# Altium PCB Controller.PcbDoc
Units mil, origin at the board's own origin, x right, y up, seen from the top; angles counter-clockwise.
Board outline 4574.71 x 2000 mil, 4 copper layers (Component Side, Ground Plane, Power Plane, Solder Side), stack 60.8 mil thick; 41 components, 203 nets, 155 pads, 164 vias.
Unrouted connection lines stored in the file: 247.
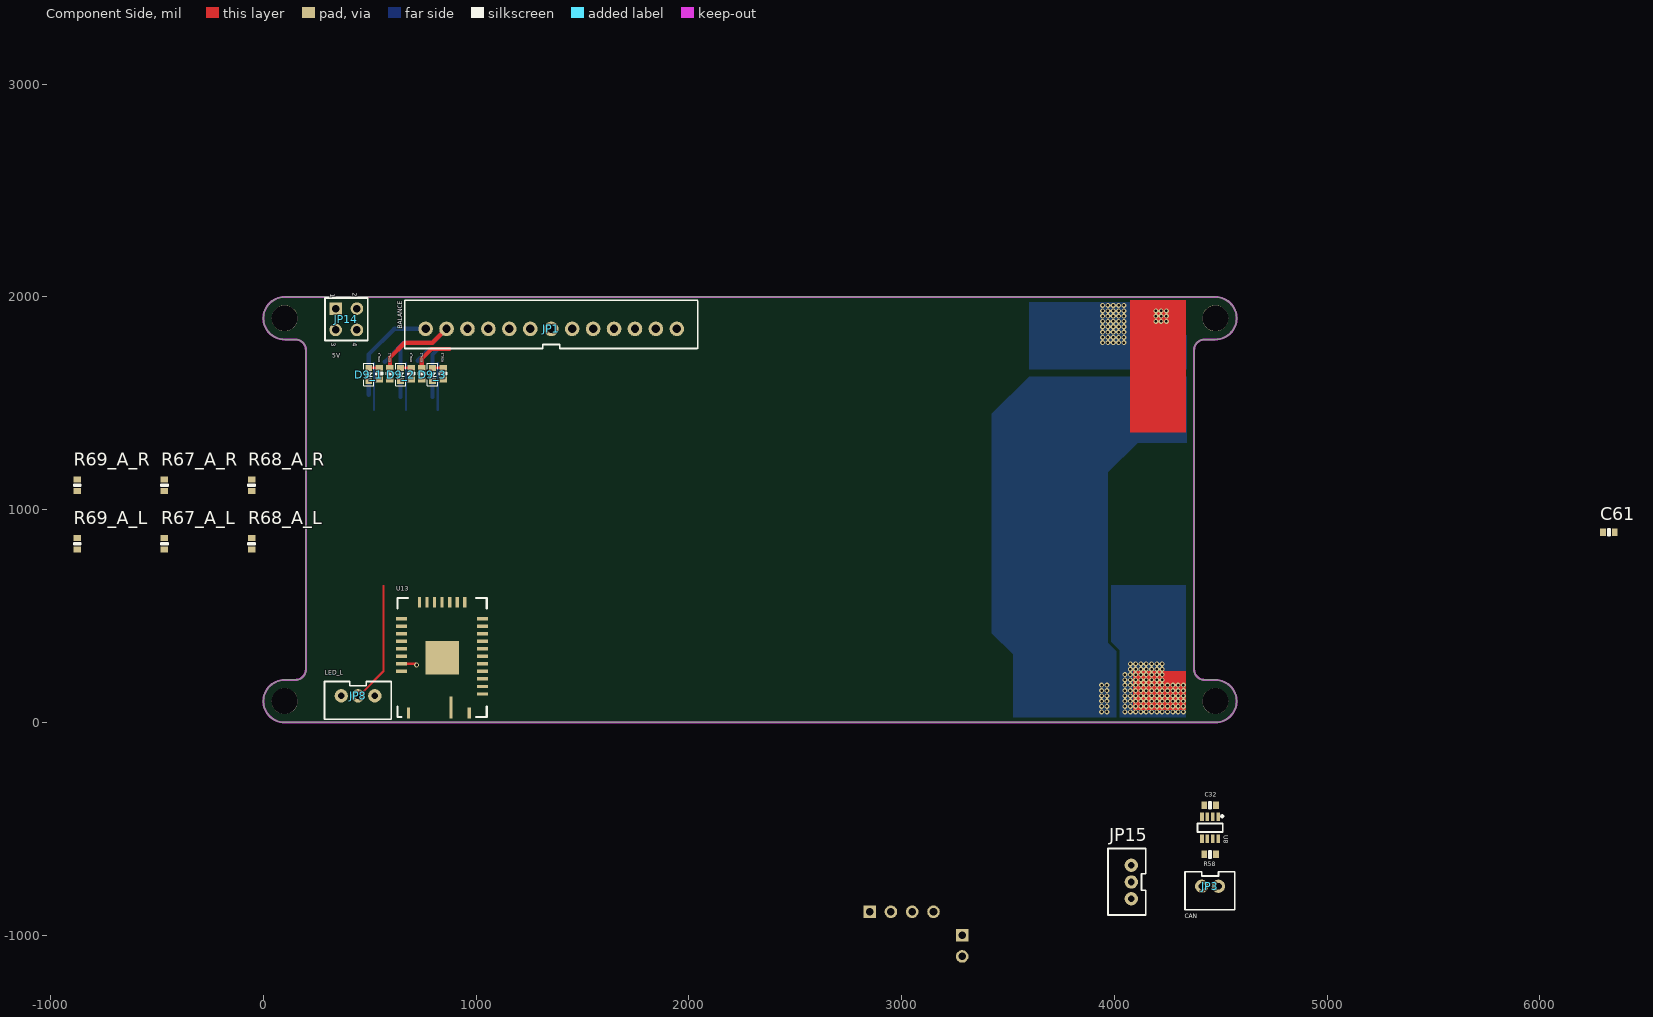
[diagram p0: Component Side view]
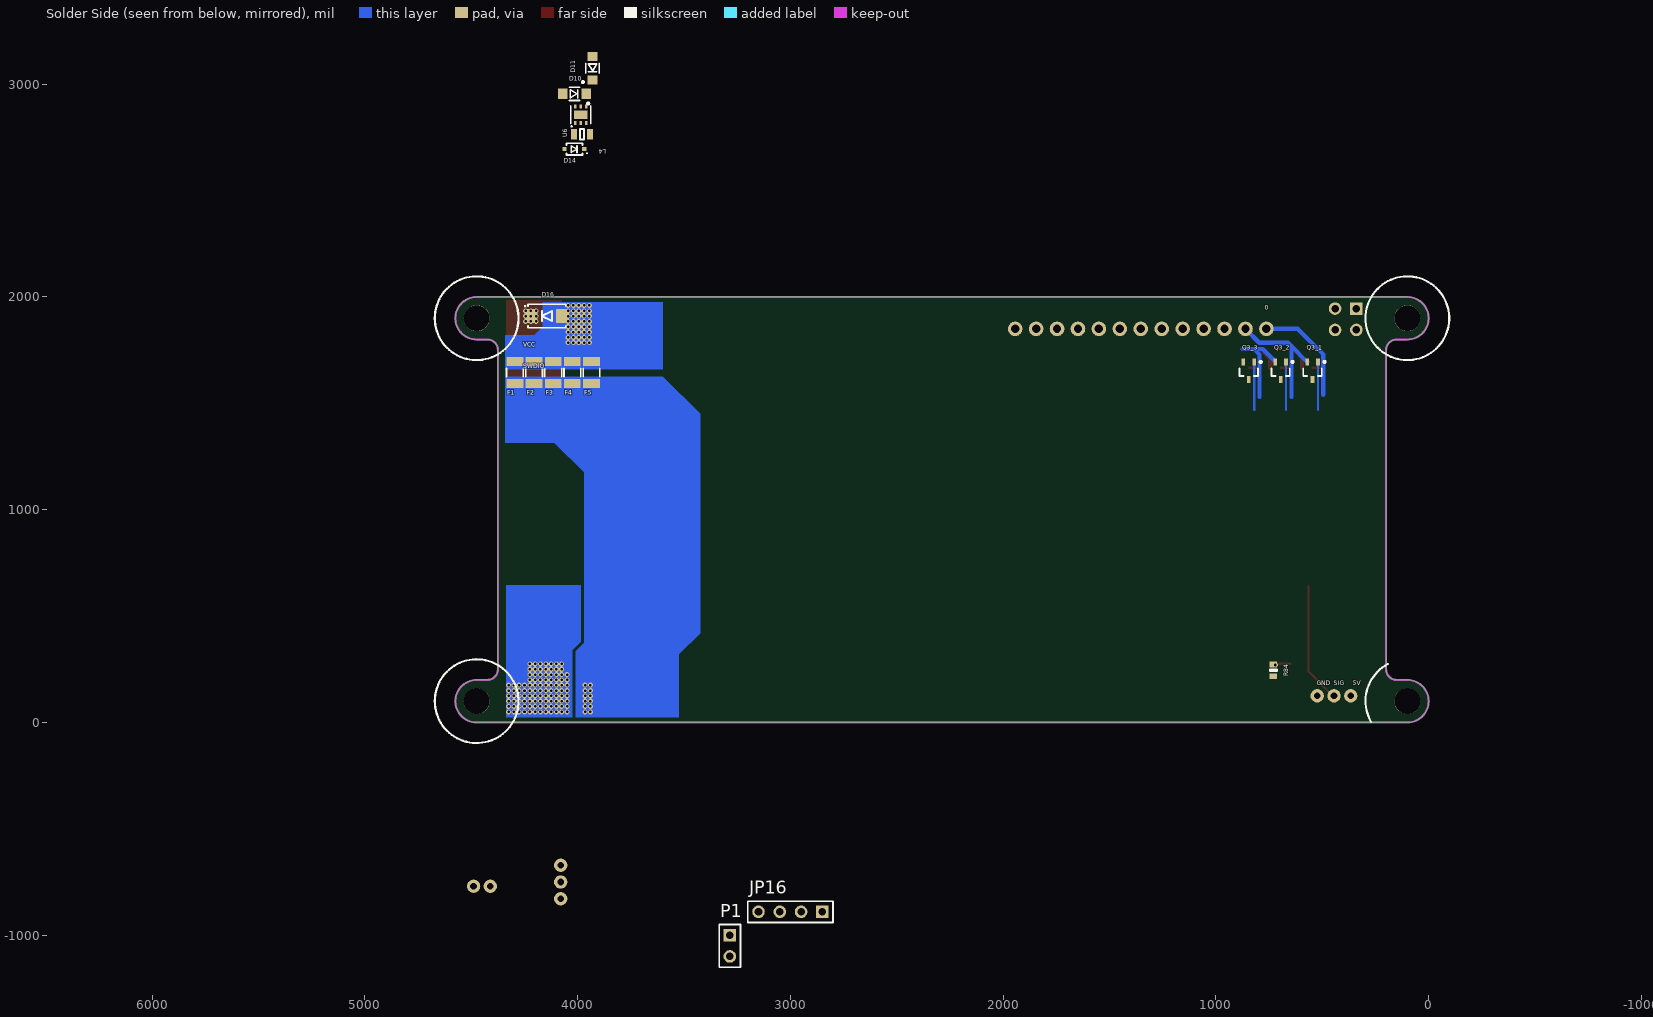
[diagram p1: Solder Side view, seen from below]
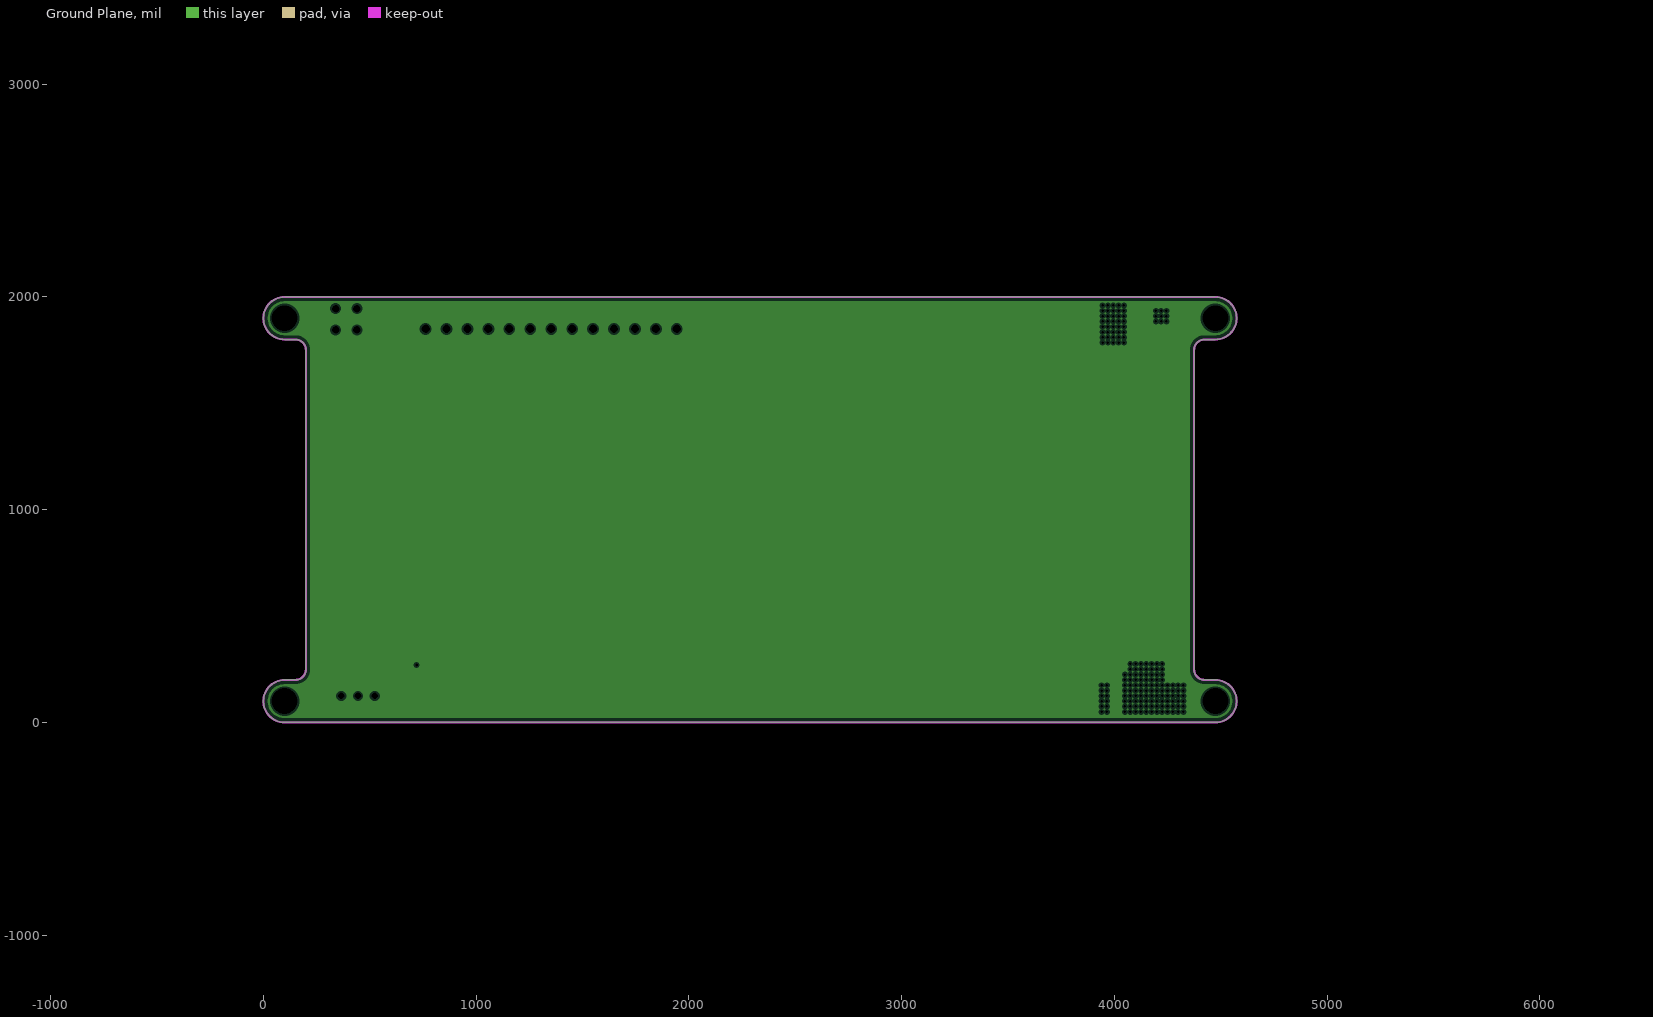
[diagram p2: Ground Plane, clearances drawn from the general rule]
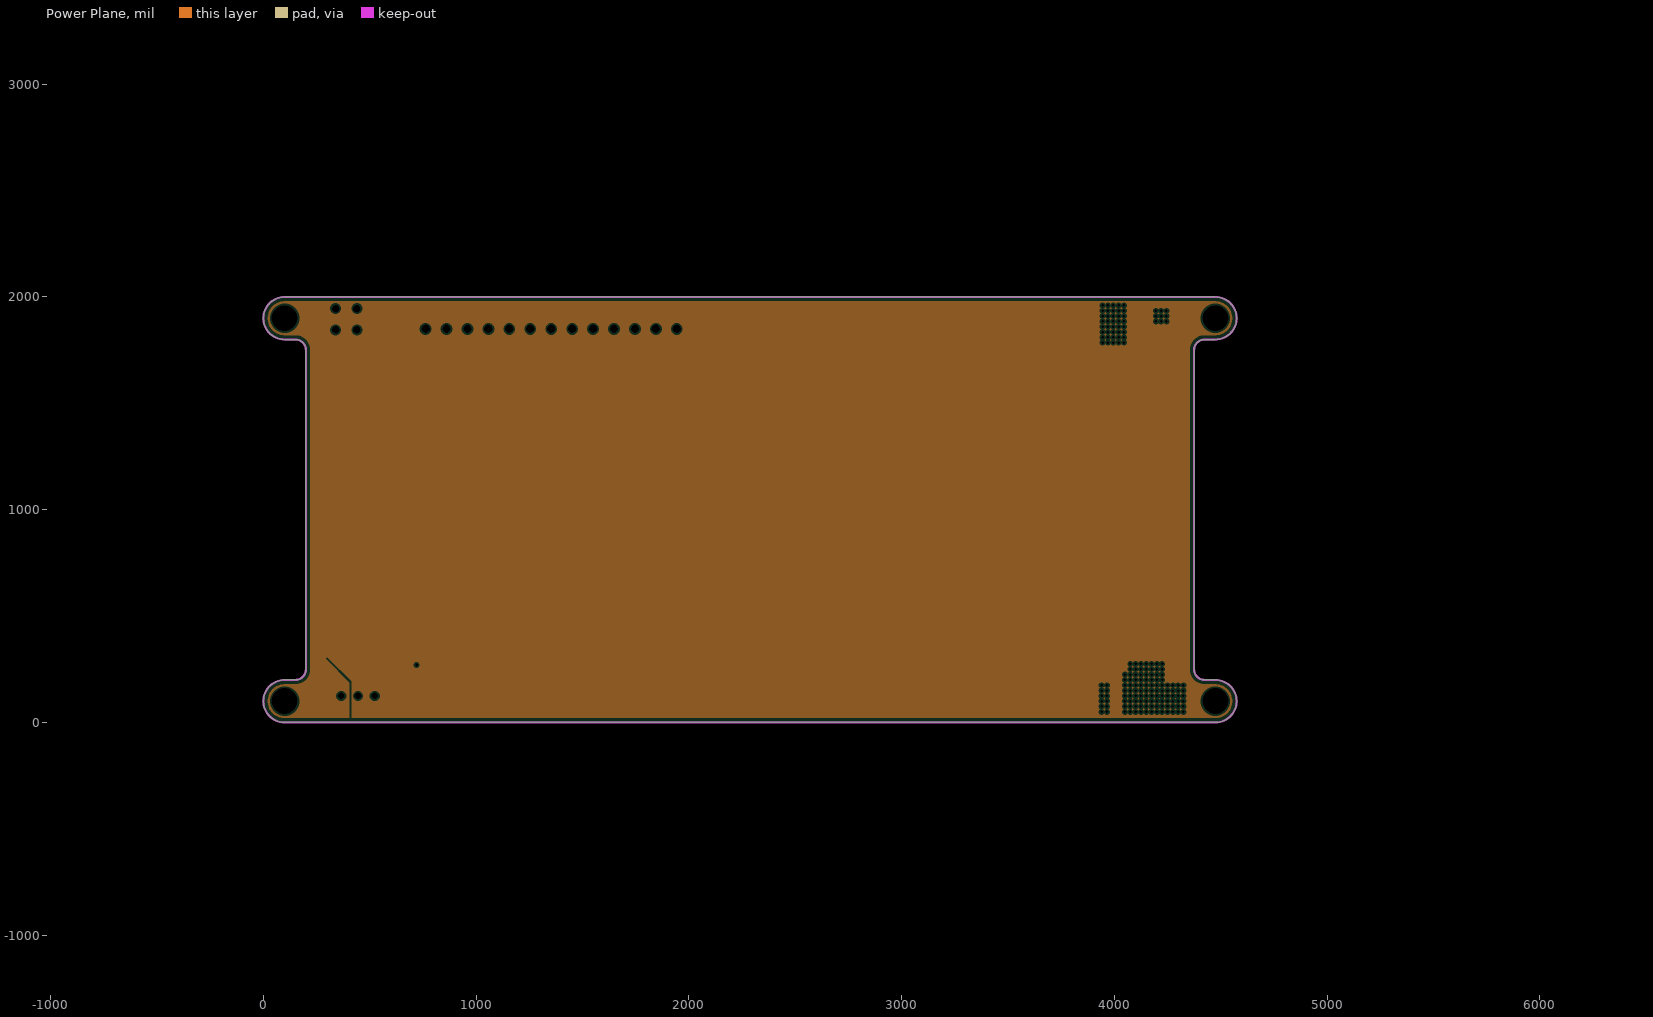
[diagram p3: Power Plane, clearances drawn from the general rule]

## Layer stack, top to bottom
Top Solder: solder mask 0.4, Solder Resist, Dk 3.5
Component Side: signal copper 1.4
Dielectric 1: prepreg 9.1, 2116, Dk 4.2
Ground Plane: plane copper 1.4, net (Multiple Nets)
Dielectric 3: core 37, FR-4, Dk 4.2
Power Plane: plane copper 1.4, net (Multiple Nets)
Dielectric 4: prepreg 9.1, 2116, Dk 4.2
Solder Side: signal copper 1.4
Bottom Solder: solder mask 0.4, Solder Resist, Dk 3.5

## Board outline
100,200 150,200 ccw(c150,250) 200,250 200,1750 ccw(c150,1750) 150,1800 100,1800 cw(c100,1900) 100,2000 4475,2000 cw(c4475,1900) 4475,1800 4425,1800 ccw(c4425,1750) 4375,1750 4375,250 ccw(c4425,250) 4425,200 4475,200 cw(c4475,100) 4475,0 100,0 cw(c100,100)

## Design rules (kind name [scope] priority, off if disabled: settings)
Clearance [All] p1: gap=6 ignorepadtopadclearanceinfootprint=FALSE except(0: Arc-Hole Track-Hole SMDPad-Hole THPad-Hole Via-Hole Fill-Hole Poly-Hole Region-Hole Text-Hole)
ComponentClearance [Not IsNetTieComponent vs Not IsNetTieComponent] p1: gap=10 collisioncheckmode=3 verticalgap=10 showdistances=FALSE
HoleSize [All] p1: absolutevalues=TRUE maxlimit=500 minlimit=1 maxpercent=80.000 minpercent=20.000
MinimumSolderMaskSliver [All] p1: minsoldermaskwidth=3
PlaneClearance [All] p1: clearance=8
PlaneConnect [All] p1: planeconnectstyle=Direct reliefexpansion=20 reliefentries=4 reliefconductorwidth=10 reliefairgap=10
PolygonConnect PolygonConnectLED [HasFootprint('XZMDKCBDDG45S-9')] p1: connectstyle=Direct reliefconductorwidth=10 reliefentries=4 polygonreliefangle="90 Angle" airgapwidth=10
PolygonConnect PolygonConnectPower [IsNamedPolygon('Power')] p2: connectstyle=Direct reliefconductorwidth=10 reliefentries=4 polygonreliefangle="90 Angle" airgapwidth=10
PolygonConnect PolygonConnectVDD [All vs InNet('VDD')] p3: connectstyle=Direct reliefconductorwidth=10 reliefentries=4 polygonreliefangle="90 Angle" airgapwidth=10
PolygonConnect PolygonConnectVia [All vs IsVia] p4: connectstyle=Direct reliefconductorwidth=10 reliefentries=4 polygonreliefangle="90 Angle" airgapwidth=10
PolygonConnect [All] p5: connectstyle=Relief reliefconductorwidth=20 reliefentries=4 polygonreliefangle="90 Angle" airgapwidth=10
RoomDefinition U_Bluetooth [InComponentClass('U_Bluetooth')] p1 off: confinementstyle=ConfineIn formatcopy=TRUE lockcomponents=FALSE outline -5140,-5375 -3140,-5375 -3140,-4375 -5140,-4375
RoomDefinition A_R [InComponentClass('A_R')] p2 off: confinementstyle=ConfineIn formatcopy=TRUE lockcomponents=FALSE outline -5140,-5375 -3140,-5375 -3140,-4375 -5140,-4375
RoomDefinition A_L [InComponentClass('A_L')] p3 off: confinementstyle=ConfineIn formatcopy=TRUE lockcomponents=FALSE outline -5140,-5375 -3140,-5375 -3140,-4375 -5140,-4375
RoomDefinition U_LTC6803 [InComponentClass('U_LTC6803')] p4 off: confinementstyle=ConfineIn formatcopy=TRUE lockcomponents=FALSE outline 9085,7375 7085,7375 7085,6375 9085,6375
RoomDefinition U_CurrentSense [InComponentClass('U_CurrentSense')] p5 off: confinementstyle=ConfineIn formatcopy=TRUE lockcomponents=FALSE outline 9085,7375 7085,7375 7085,6375 9085,6375
RoomDefinition U_Charging [InComponentClass('U_Charging')] p6 off: confinementstyle=ConfineIn formatcopy=TRUE lockcomponents=FALSE outline 9085,7375 7085,7375 7085,6375 9085,6375
RoomDefinition U_Switches [InComponentClass('U_Switches')] p7 off: confinementstyle=ConfineIn formatcopy=TRUE lockcomponents=FALSE outline -75,-1280 -790,-1280 -790,-1800 -75,-1800
RoomDefinition U_MCU [InComponentClass('U_MCU')] p8 off: confinementstyle=ConfineIn formatcopy=TRUE lockcomponents=FALSE outline -75,-910 -3340,-910 -3340,-1230 -75,-1230
RoomDefinition U_Connectors [InComponentClass('U_Connectors')] p9 off: confinementstyle=ConfineIn formatcopy=TRUE lockcomponents=FALSE outline -75,655 -1545,655 -1545,-860 -75,-860
RoomDefinition U_CAN [InComponentClass('U_CAN')] p10: confinementstyle=ConfineIn formatcopy=TRUE lockcomponents=FALSE outline 4540,-350 4380,-350 4380,-660 4540,-660
RoomDefinition U_3V3 [InComponentClass('U_3V3')] p11 off: confinementstyle=ConfineIn formatcopy=TRUE lockcomponents=FALSE outline -870,2160 -2605,2160 -2605,1900 -870,1900
RoomDefinition 3 [InComponentClass('3')] p12: confinementstyle=ConfineIn formatcopy=TRUE lockcomponents=FALSE outline 935,1735 750,1735 750,1455 935,1455
RoomDefinition 2 [InComponentClass('2')] p13: confinementstyle=ConfineIn formatcopy=TRUE lockcomponents=FALSE outline 785,1735 600,1735 600,1455 785,1455
RoomDefinition 1 [InComponentClass('1')] p14: confinementstyle=ConfineIn formatcopy=TRUE lockcomponents=FALSE outline 635,1735 450,1735 450,1455 635,1455
RoutingVias [All] p1: holewidth=10 width=20 viastyle="Through Hole" minholewidth=10 minwidth=20 maxholewidth=28 maxwidth=50
SilkToSilkClearance [All] p1: silktosilkclearance=0
SolderMaskExpansion SolderMaskExpansionVia [IsVia] p1: expansion=1 soldermaskfromhole=TRUE
SolderMaskExpansion [All] p2: expansion=3
Width [All] p1: maxlimit=500 minlimit=10 preferedwidth=10 minimp=50.000000 maximp=50.000000 favimp=50.000000
24 further rules are at their usual default settings.

## Classes and differential pairs
channel class ADC: A_L A_R
component class U_Bluetooth: R84 U13
component class A_R: R67_A_R R68_A_R R69_A_R R?_A_R
component class A_L: R67_A_L R68__1 R68_A_L R69_A_L R?_A_L
component class U_Connectors: ACCESSORY JP1 JP3 JP8 JP14 JP15 JP16 JP? P1
component class U_CAN: C32 R58 U8
component class 1: D9_1 Q3_1 R34_1 R36_1
component class 2: D9_2 Q3_2 R34_2 R36_2
component class 3: D9_3 Q3_3 R36_3
component class U_3V3: C42 C43 C44 C61 C? D10 D11 D14 L4 U6
channel class Cell: 1 2 3 4 5 6 7 8 9 10 11 12
component class U_Switches: D16 F1 F2 F3 F4 F5

## Components (designator, comment, footprint, x,y, rotation, side; value= is the part's Value field where it differs from the comment)
C32 "0.1uF 6.3V 0603" C0603[1608X92] 4450,-390 r0 top value=0.1uF
C61 "0.1uF 100V 0603" C0603[1608X92] 6325,895 r0 top value=0.1uF
D9_1 "LED_0603_BLUE_5mA" LED0603 495,1635 r270 top (schematic designator D9)
D9_2 "LED_0603_BLUE_5mA" LED0603 645,1635 r270 top (schematic designator D9)
D9_3 "LED_0603_BLUE_5mA" LED0603 795,1635 r270 top (schematic designator D9)
D10 "PMEG6020ER" SOD-123 4015,2955 r0 bottom
D11 "PMEG6020ER" SOD-123 3930,3075 r90 bottom
D14 "SP4020-01FTG" SOD-323 4015,2695 r0 bottom
D16 "SMAJ51A" DO-214AC 4145,1910 r180 bottom
F1 "FUSE 1206" 1206_FUSE 4295,1645 r90 bottom
F2 "FUSE 1206" 1206_FUSE 4205,1645 r90 bottom
F3 "FUSE 1206" 1206_FUSE 4115,1645 r90 bottom
F4 "FUSE 1206" 1206_FUSE 4025,1645 r90 bottom
F5 "FUSE 1206" 1206_FUSE 3935,1645 r90 bottom
JP1 "BALANCE" JST-XH-13-PTH-VERT 1353.15,1850 r0 top
JP3 "CAN" JST-PH-2-PTH-VERT 4450,-770 r180 top
JP8 "LED_L" JST-PH-3-PTH-VERT 445,125 r180 top
JP14 "5V" HDR2X2 340,1945 r270 top
JP15 "LIGHT" JST-PH-3-PTH-VERT 4080,-750 r90 top
JP16 "3V3" HDR1X4 2850,-890 r0 bottom
L4 "2.2uH" IND0805 3980,2765 r180 bottom
P1 "Header 2" HDR1X2 3285,-1000 r270 bottom
Q3_1 "BSS84PWH6327XTSA1" SOT323-3 545.59,1653.46 r270 bottom (schematic designator Q3)
Q3_2 "BSS84PWH6327XTSA1" SOT323-3 695.59,1653.46 r270 bottom (schematic designator Q3)
Q3_3 "BSS84PWH6327XTSA1" SOT323-3 845.59,1653.46 r270 bottom (schematic designator Q3)
R34_1 "100R 1% 0603" R0603[1608] 595,1640 r270 top value=100R (schematic designator R34)
R34_2 "100R 1% 0603" R0603[1608] 745,1640 r270 top value=100R (schematic designator R34)
R36_1 "100R 1% 0603" R0603[1608] 545,1640 r90 top value=100R (schematic designator R36)
R36_2 "100R 1% 0603" R0603[1608] 695,1640 r90 top value=100R (schematic designator R36)
R36_3 "100R 1% 0603" R0603[1608] 845,1640 r90 top value=100R (schematic designator R36)
R58 "120R 1% 0603" R0603[1608] 4450,-620 r0 top value=120R
R67_A_L "330R 0.1% 0603" R0603[1608] -465,840 r90 top value=330R (schematic designator R67)
R67_A_R "330R 0.1% 0603" R0603[1608] -465,1115 r90 top value=330R (schematic designator R67)
R68_A_L "330R 0.1% 0603" R0603[1608] -55,840 r90 top value=330R (schematic designator R68)
R68_A_R "330R 0.1% 0603" R0603[1608] -55,1115 r90 top value=330R (schematic designator R68)
R69_A_L "330R 0.1% 0603" R0603[1608] -875,840 r90 top value=330R (schematic designator R69)
R69_A_R "330R 0.1% 0603" R0603[1608] -875,1115 r90 top value=330R (schematic designator R69)
R84 "10K 1% 0603" R0603[1608] 730,245 r270 bottom value=10K
U6 "TPS62291DRVR" WSON-6 3985.59,2856.61 r90 bottom
U8 "TCAN332DCNR" SOT-23-8 4450,-495 r270 top
U13 "FBL780BC_Serial" FBL780BC_Serial 840,305 r180 top

## Footprints (in the part's own frame and the unit in brackets; to place one, negate y for a bottom-side part, rotate by r counter-clockwise, add the part's x,y. Pads: shape width x height; smd on the part's side, far side on the other; paste and mask are expansions set on the pad)
1206_FUSE [mm]
  rect 1.1x2 smd: 1(-1.3,0) 2(1.3,0)
  silkscreen extent -0.5,-1 0.5,1, body extent -1.61,-0.8 1.61,0.8, height 0.67
C0603[1608X92] [mm] "Chip Capacitor, Body 1.6x0.8mm"
  rect 0.7x0.9 smd: 1(-0.7,0) 2(0.7,0)
  silkscreen extent -0.13,-0.38 0.13,0.38, body extent -0.8,-0.4 0.8,0.4, height 0.93
DO-214AC [mm] "DO-214AC, 2-Leads, Body 4.5x2.79mm, IPC Medium Density"
  rect 1.52x1.68 smd: 1(-1.88,0) 2(1.88,0)
  silkscreen extent -2.65,-1.4 2.25,1.4, body extent -2.8,-1.48 2.8,1.48, height 2.7
FBL780BC_Serial [mm]
  rect 1.3x0.4 smd: 1(-4.85,3.45) 1(-4.85,4.35) 1(-4.85,1.65) 1(-4.85,2.55) 1(4.85,1.65) 5(-4.85,0.75) 6(-4.85,-0.15) 7(-4.85,-1.05) 8(-4.85,-1.95) 9(-4.85,-2.85) 10(-4.85,-3.75) 11(-4.85,-4.65) 19(4.85,-4.65) 20(4.85,-3.75) 21(4.85,-2.85) 22(4.85,-1.95) 23(4.85,-1.05) 24(4.85,-0.15) 25(4.85,0.75)
  rect 0.4x1.3 smd: 1(-3.25,6.6) 1(4,6.6) 12(-2.7,-6.6) 13(-1.8,-6.6) 14(-0.9,-6.6) 15(0,-6.6) 16(0.9,-6.6) 17(1.8,-6.6) 18(2.7,-6.6)
  rect 4x4 smd: 1(0,0)
  rect 0.35x2.6 smd: 28(-1.05,5.95)
  Component Side region: -0.254,1.448
  silkscreen extent -5.33,-7.11 5.33,7.11
HDR1X2 [mm] "Connector; Header; 2 Position"
  rect 1.5x1.5 hole 0.9: 1(0,0)
  round 1.5 hole 0.9: 2(2.54,0)
  silkscreen extent -1.27,-1.27 3.81,1.27
HDR1X4 [mm] "Connector; Header; 4 Position"
  rect 1.5x1.5 hole 0.9: 1(0,0)
  round 1.5 hole 0.9: 2(2.54,0) 3(5.08,0) 4(7.62,0)
  silkscreen extent -1.27,-1.27 8.89,1.27
HDR2X2 [mm] "Connector; Header; 2x2 Position"
  rect 1.5x1.5 hole 0.9: 1(0,0)
  round 1.5 hole 0.9: 2(0,2.54) 3(2.54,0) 4(2.54,2.54)
  silkscreen extent -1.27,-1.27 3.81,3.81
IND0805 [mm] "Chip Inductor Body 2.0x1.25mm"
  rect 0.7x1.3 smd: 1(-0.95,0) 2(0.95,0)
  silkscreen extent -0.25,-0.64 0.25,0.64, body extent -1,-0.63 1,0.62, height 0.85
JST-PH-2-PTH-VERT [mil]
  round 63 hole 31.5: 1(-39.37,0) 2(39.37,0)
  silkscreen extent -116,-68 118,110, body extent -116,-67 116,110, height 236
JST-PH-3-PTH-VERT [mil]
  round 63 hole 31.5: 1(-78.74,0) 2(0,0) 3(78.74,0)
  silkscreen extent -156,-68 157,110, body extent -155,-67 156,110, height 236
JST-XH-13-PTH-VERT [mm]
  round 1.75 hole 1: 1(-15,0) 2(-12.5,0) 3(-10,0) 4(-7.5,0) 5(-5,0) 6(-2.5,0) 7(0,0) 8(2.5,0) 9(5,0) 10(7.5,0) 11(10,0) 12(12.5,0) 13(15,0)
  silkscreen extent -17.5,-2.36 17.5,3.4, body extent -17.45,-2.38 17.45,3.37, height 7
LED0603 [mm]
  rect 0.7x0.8 smd: A(-0.8,0) C(0.8,0)
  silkscreen extent -1.35,-0.6 1.35,0.6, body extent -0.8,-0.4 0.8,0.4, height 0.75
R0603[1608] [mm] "Chip Resistor, Body 1.55x0.85mm"
  rect 0.7x0.9 smd: 1(-0.7,0) 2(0.7,0)
  silkscreen extent -0.1,-0.4 0.1,0.4, body extent -0.77,-0.42 0.78,0.43, height 0.45
SOD-123 [mm] "SOD, 2-Leads, Body 2.69x1.6mm"
  rect 1.1x1.22 smd: 1(-1.4,0) 2(1.4,0)
  silkscreen extent -1.76,-0.8 0.6,1.28, body extent -1.75,-0.8 1.75,0.8, height 1.1
SOD-323 [mm] "SODFL, 2-Leads, Body 1.30x2.57mm, IPC Medium Density"
  rect 0.5x0.45 smd: 1(-1.175,0) 2(1.175,0)
  silkscreen extent -1.55,-0.7 0.95,0.7, body extent -1.25,-0.63 1.25,0.62, height 0.98
SOT323-3 [mm] "SOT23, 3-Leads, Body 2.00x2.10mm, Pitch 0.65mm, IPC Medium Density"
  rect 0.85x0.45 smd: 1(-1.055,0.65) 2(-1.055,-0.65) 3(1.055,0)
  silkscreen extent -1.18,-1.1 0.63,1.55, body extent -1.12,-1.1 1.12,1.1, height 1.1
SOT-23-8 [mm] "SOT23, 8-Leads, Body 2.90x1.60mm, Pitch 0.65mm, IPC Medium Density"
  rect 1x0.45 smd mask+0.08: 1(-1.3,0.975) 2(-1.3,0.325) 3(-1.3,-0.325) 4(-1.3,-0.975) 5(1.3,-0.975) 6(1.3,-0.325) 7(1.3,0.325) 8(1.3,0.975)
  silkscreen extent -1.5,-1.5 0.5,1.58, body extent -1.4,-1.47 1.4,1.47, height 1.2
WSON-6 [mm] "SON, 6-Leads, Body 2x2mm, Pitch 0.65mm, Thermal Pad 1.6x1mm, TI Recommended"
  rect 0.45x0.3 smd: 1(-0.975,0.65) 2(-0.975,0) 3(-0.975,-0.65) 4(0.975,-0.65) 5(0.975,0) 6(0.975,0.65)
  rect 1x1.6 smd paste-0.5: 7(0,0)
  rrect0% 1x0.7 on Bottom Paste: 7_1(0,0.45) 7_2(0,-0.45)
  silkscreen extent -1.45,-1.2 1.05,1.2, body extent -1.05,-1.05 1.05,1.05, height 0.81

## Part data
C32: library part CAP_0.1uF_6.3V_0603_10%, "0.1uF 6.3V 10% 0603 (1608 Metric)", Manufacturer=Murata, PartNumber=GRM188R70J104KA01D, Tolerance=10%, Voltage=6.3V, Mounting Technology="Surface Mount", PackageDescription="0603 (1608 Metric)", PackageReference=0603
C61: library part CAP_0.1uF_100V_0603_10%, "0.1uF 100V 10% 0603 (1608 Metric)", Manufacturer=Murata, PartNumber=GRM188R72A104KA35D, TemperatureCoefficient=X7R, Tolerance=10%, Voltage=100V, Mounting Technology="Surface Mount", PackageDescription="0603 (1608 Metric)", PackageReference=0603
D9_1 D9_2 D9_3: Manufacturer="Lite-On Inc.", PartNumber=LTST-C193TBKT-5A, Mounting Technology="Surface Mount", PackageDescription="0603 (1608 Metric)", PackageReference=0603
D10 D11: Manufacturer="NXP Semiconductors", PartNumber=PMEG6020ER,115, Mounting Technology="Surface Mount", PackageDescription="SOD, 2-Leads, Body 2.69x1.6mm", PackageReference=SOD-123W
D14: Manufacturer=Littelfuse, Mounting Technology="Surface Mount", PackageReference=SOD-323-2, PartNumber=SP4020-01FTG
D16: library part SMAJ51A-E3/61, Manufacturer=Vishay, Mounting Technology="Surface Mount", PackageDescription="DO-214AC, 2 Leads", PackageReference=DO-214AC, PartNumber=SMAJ51A-E3/61
F1 F2 F3 F4 F5: "Surface Mount Fuses UST 1206 FUSE 25A F", Current=25A, Manufacturer=Schurter, PartNumber=3413.0332.22, Mounting Technology="Surface Mount", PackageDescription="1206 (3216 Metric)", PackageReference=1206
JP1: library part JST_XH_13_VERT, Manufacturer="JST Sales America, Inc.", PartNumber=B13B-XH-A(LF)(SN), Mounting Technology="Through Hole", PackageReference=JST-XH
JP3: library part JST_PH_2_VERT, Manufacturer="JST Sales America Inc.", PartNumber=B2B-PH-K-S(LF)(SN), Mounting Technology="Through Hole", PackageReference=JST-PH
JP8 JP15: library part JST_PH_3_VERT, Manufacturer="JST Sales America Inc.", PartNumber=B3B-PH-K-S(LF)(SN), Mounting Technology="Through Hole", PackageReference=JST-PH
JP14: library part "Header 2X2", "Header, 2-Pin, Dual row", LatestRevisionDate=17-Jul-2002, LatestRevisionNote="Re-released for DXP Platform.", Publisher="Altium Limited"
JP16: library part "Header 4", "Header, 4-Pin", LatestRevisionDate=17-Jul-2002, LatestRevisionNote="Re-released for DXP Platform.", Publisher="Altium Limited"
L4: library part IND_2.2uH_1.7A_0805_20%, "2.2uH 20% 1.7A 0805", Current=1.7A, Manufacturer=Murata, PartNumber=LQM21PN2R2MGHL, Mounting Technology="Surface Mount", PackageDescription="0805 (2012 metric)", PackageReference=0805
P1: "Header, 2-Pin", LatestRevisionDate=17-Jul-2002, LatestRevisionNote="Re-released for DXP Platform.", Publisher="Altium Limited"
Q3_1 Q3_2 Q3_3: library part "BSS84PW H6327", "P-Channel MOSFET", Manufacturer=Infineon, Mounting Technology="Surface Mount", PackageReference=SOT323-3, PartNumber=BSS84PWH6327XTSA1
R34_1 R34_2 R36_1 R36_2 R36_3: library part RES_100R_0603_1%, "100R 0.25W 1% 0603 (1005 Metric)", Manufacturer="Vishay / Dale", PartNumber=CRCW0603100RFKEAHP, Power=0.25W, Tolerance=1%, ComponentLink1Description=Datasheet, ComponentLink1URL=http://www.vishay.com/docs/20043/crcwhpe3.pdf, Mounting Technology="Surface Mount", PackageDescription="0603 (1608 Metric)", PackageReference=0603
R58: library part RES_120R_0603_1%, "120R 0.25W 1% 0603 (1005 Metric)", Manufacturer="Vishay / Dale", PartNumber=CRCW0603120RFKEAHP, Power=0.25W, Tolerance=1%, ComponentLink1Description=Datasheet, ComponentLink1URL=http://www.vishay.com/docs/20043/crcwhpe3.pdf, Mounting Technology="Surface Mount", PackageDescription="0603 (1608 Metric)", PackageReference=0603
R67_A_L R67_A_R R68_A_L R68_A_R R69_A_L R69_A_R: library part RES_330R_0603_0.1%, "330R 0.2W 1% 0603 (1005 Metric)", Manufacturer=Panasonic, PartNumber=ERJ-PB3B3300V, Power=0.2W, Tolerance=0.1%, ComponentLink1Description=Datasheet, ComponentLink1URL=http://www.vishay.com/docs/20043/crcwhpe3.pdf, Mounting Technology="Surface Mount", PackageDescription="0603 (1608 Metric)", PackageReference=0603
R84: library part RES_10K_0603_1%, "10K 0.25W 1% 0603 (1005 Metric)", Manufacturer=Vishay, PartNumber=RCS060310K0FKEA, Power=0.25W, Tolerance=1%, ComponentLink1Description=Datasheet, ComponentLink1URL=http://www.vishay.com/docs/20065/rcse3.pdf, Mounting Technology="Surface Mount", PackageDescription="0603 (1608 Metric)", PackageReference=0603
U6: "Voltage Regulators - Switching Regulators 2.25MHz 1A Step-Down Cnvrtr 3.3V Output", Manufacturer="Texas Instruments", Mounting Technology="Surface Mount", PackageDescription="SON, 6-Leads, Body 2x2mm, Pitch 0.65mm, Thermal Pad 1.6x1mm, TI Recommended", PackageReference=WSON-6, PartNumber=TPS62291DRVR
U8: "CAN Interface IC 3.3-V CAN Transceivers with CAN FD (Flexible Data Rate) 8-SOT-23 -40 to 125", Manufacturer="Texas Instruments", Mounting Technology="Surface Mount", PackageDescription="SOT23, 8-Leads", PackageReference=SOT-23-8, PartNumber=TCAN332DCNR
U13: Manufacturer=Firmtech, PartNumber=FBL780BC_Serial

## Free pads (board coordinates)
  round 122.05 hole 122.05 mask+0: 0(100,100) 0(100,1900) 0(4475,100) 0(4475,1900)
  round 122.05 on Bottom Paste mask+0: 2(100,100) 2(100,1900) 2(4475,100) 2(4475,1900)
  round 122.05 on Top Paste mask+0: 2(100,100) 2(100,1900) 2(4475,100) 2(4475,1900)

## Via types
v1: diameter 23.62, hole 11.81, Component Side to Solder Side, 164 vias

## Nets (pads, with @x,y where several pads share a name; then routed paths per layer and width w, separated by ;. In a path a pad name is that pad's centre, name@x,y a point inside that pad or via, vN(x,y) a via of type N, cw(c..) or ccw(c..) an arc to the next point about the centre after c; other vN are vias at no path point)
5V: D10.2 JP8.3 JP14.1 JP14.3 JP15.3 JP16.3 R67_A_L.2 R67_A_R.2 R68_A_L.2 R68_A_R.2
ACC.ACC1: JP16.2
ACC.ACC2: JP16.1
ADC1.CSB: 
ADC1.RDYB: 
ADC2.CSB: 
ADC2.RDYB: 
AINN_A_L: R67_A_L.1 R69_A_L.2
AINN_A_R: R67_A_R.1 R69_A_R.2
AINP_A_L: R68_A_L.1
AINP_A_R: R68_A_R.1
AVDD: 
B+: D16.1
  other v1: 4195,1885 4220,1885 4245,1885 4195,1910 4220,1910 4245,1910 4195,1935 4220,1935 4245,1935
C1: 
C+: 
CAN.RX: U8.4
CAN.TX: U8.1
CELL0: D9_1.C JP1.1 | length 507.3
  Solder Side w20: 495,1540 495,1730 615,1850 JP1.1
CELL1: D9_2.C JP1.2 Q3_1.2 R34_1.1 | length 954.2
  Component Side w20: R34_1.1 595,1715 665,1785 795,1785 JP1.2@855,1845
  Solder Side w20: Q3_1.2 645,1768.82 ; 645,1530 645,1768.82 ; JP1.2 796.02,1785 661.18,1785 645,1768.82
CELL2: D9_3.C JP1.3 Q3_2.2 R34_2.1 | length 598.4
  Component Side w20: R34_2.1 745,1710 790,1755 875,1755
  Solder Side w20: Q3_2.2@725.59,1700.59 780,1755 820,1755 ; 795,1530 795,1730 820,1755 ; 875,1755 820,1755
CELL3: JP1.4 Q3_3.2
CELL4: JP1.5
CELL5: JP1.6
CELL6: JP1.7
CELL7: JP1.8
CELL8: JP1.9
CELL9: JP1.10
CELL10: JP1.11
CELL11: JP1.12
CELL12: JP1.13
CHARGE_GATE: 
CHG+: 
DISCHARGE_GATE: 
DL: 
DSG+: 
  other v1: 4050,50 4075,50 4100,50 4125,50 4150,50 4175,50 4200,50 4225,50 4250,50 4275,50 4300,50 4325,50 4050,75 4075,75 4100,75 4125,75 4150,75 4175,75 4200,75 4225,75 4250,75 4275,75 4300,75 4325,75 4050,100 4075,100 4100,100 4125,100 4150,100 4175,100 4200,100 4225,100 4250,100 4275,100 4300,100 4325,100 4050,125 4075,125 4100,125 4125,125 4150,125 4175,125 4200,125 4225,125 4250,125 4275,125 4300,125 4325,125 4050,150 4075,150 4100,150 4125,150 4150,150 4175,150 4200,150 4225,150 4250,150 4275,150 4300,150 4325,150 4050,175 4075,175 4100,175 4125,175 4150,175 4175,175 4200,175 4225,175 4250,175 4275,175 4300,175 4325,175 4050,200 4075,200 4100,200 4125,200 4150,200 4175,200 4200,200 4225,200 4050,225 4075,225 4100,225 4125,225 4150,225 4175,225 4200,225 4225,225 4075,250 4100,250 4125,250 4150,250 4175,250 4200,250 4225,250 4075,275 4100,275 4125,275 4150,275 4175,275 4200,275 4225,275
DSG-: F1.1 F2.1 F3.1 F4.1 F5.1
  other v1: 3940,50 3965,50 3940,75 3965,75 3940,100 3965,100 3940,125 3965,125 3940,150 3965,150 3940,175 3965,175
GND: C32.2 C61.1 D14.2 D16.2 F1.2 F2.2 F3.2 F4.2 F5.2 JP8.1 JP14.2 JP14.4 JP15.1 JP16.4 pad.0@100,100 pad.0@100,1900 pad.0@4475,100 R69_A_L.1 R69_A_R.1 R84.2 U6.2 U6.6 U6.7 U8.2 U13.1
  other v1: 3945,1785 3970,1785 3995,1785 4020,1785 4045,1785 3945,1810 3970,1810 3995,1810 4020,1810 4045,1810 3945,1835 3970,1835 3995,1835 4020,1835 4045,1835 3945,1860 3970,1860 3995,1860 4020,1860 4045,1860 3945,1885 3970,1885 3995,1885 4020,1885 4045,1885 3945,1910 3970,1910 3995,1910 4020,1910 4045,1910 3945,1935 3970,1935 3995,1935 4020,1935 4045,1935 3945,1960 3970,1960 3995,1960 4020,1960 4045,1960
I2C2.SCL: 
I2C2.SDA: 
I2C3.SCL: 
I2C3.SDA: 
LED.BLUE: 
LED.GREEN: 
LED.RED: 
NetBOOT_2: 
NetC1_2: 
NetC2_2: 
NetC3_2: 
NetC4_2: 
NetC5_2: 
NetC7_1: 
NetC8_1: 
NetC14_2: 
NetC15_2: 
NetC16_2: 
NetC23_1_2: R34_1.2
NetC23_2: 
NetC23_2_2: R34_2.2
NetC23_3_2: 
NetC23_4_2: 
NetC23_5_2: 
NetC23_6_2: 
NetC23_7_2: 
NetC23_8_2: 
NetC23_9_2: 
NetC23_10_2: 
NetC23_11_2: 
NetC23_12_2: 
NetC25_2: 
NetC26_2: 
NetC28_2: D10.1 D11.1 U6.4 U6.5
NetC30_1: 
NetC30_2: 
NetC36_2: 
NetC37_1: 
NetC46_1: 
NetC46_2: 
NetC50_A_L_2: 
NetC50_A_R_2: 
NetC51_A_L_1: 
NetC51_A_L_2: 
NetC51_A_R_1: 
NetC51_A_R_2: 
NetC52_A_L_2: 
NetC52_A_R_2: 
NetC58_2: 
NetC59_2: 
NetC69_A_L_2: 
NetC69_A_R_2: 
NetD1_1: 
NetD2_1: 
NetD2_3: 
NetD2_4: 
NetD4_A: 
NetD5_2: 
NetD7_A: 
NetD9_1_A: D9_1.A R36_1.2 | length 50.2
  Component Side w10: D9_1.A 497.56,1667.56 R36_1.2
NetD9_2_A: D9_2.A R36_2.2 | length 50.2
  Component Side w10: D9_2.A 647.56,1667.56 R36_2.2
NetD9_3_A: D9_3.A R36_3.2 | length 50.2
  Component Side w10: D9_3.A 797.56,1667.56 R36_3.2
NetD9_4_A: 
NetD9_5_A: 
NetD9_6_A: 
NetD9_7_A: 
NetD9_8_A: 
NetD9_9_A: 
NetD9_10_A: 
NetD9_11_A: 
NetD9_12_A: 
NetD13_A: 
NetD19_A: 
NetJP3_1: JP3.1 R58.2 U8.7
NetJP3_2: JP3.2 R58.1 U8.6
NetJP4_2: 
NetJP8_2: JP8.2 | length 562.6
  Component Side w10: JP8.2@450,125 565,240 565,640
NetJP9_2: 
NetJP10_1: 
NetJP11_1: 
NetJP15_2: JP15.2
NetL4_1: L4.1 U6.1
NetLS1_2: 
NetP1_1: P1.1
NetP1_2: P1.2
NetQ1_1: 
NetQ2_1: 
NetQ2_2: 
NetQ3_1_1: Q3_1.1 | length 220
  Solder Side w10: 520,1470 Q3_1.1@520,1690
NetQ3_1_3: Q3_1.3 R36_1.1
NetQ3_2_1: Q3_2.1 | length 220
  Solder Side w10: 670,1470 Q3_2.1@670,1690
NetQ3_2_3: Q3_2.3 R36_2.1
NetQ3_3_1: Q3_3.1 | length 220
  Solder Side w10: 820,1470 Q3_3.1@820,1690
NetQ3_3_3: Q3_3.3 R36_3.1
NetQ3_4_1: 
NetQ3_4_3: 
NetQ3_5_1: 
NetQ3_5_3: 
NetQ3_6_1: 
NetQ3_6_3: 
NetQ3_7_1: 
NetQ3_7_3: 
NetQ3_8_1: 
NetQ3_8_3: 
NetQ3_9_1: 
NetQ3_9_3: 
NetQ3_10_1: 
NetQ3_10_3: 
NetQ3_11_1: 
NetQ3_11_3: 
NetQ3_12_1: 
NetQ3_12_3: 
NetQ5_2: 
NetQ8_1: 
NetQ8_3: 
NetQ9_1: 
NetQ9_3: 
NetQ11_1: 
NetQ13_1: 
NetR6_1: 
NetR7_1: 
NetR9_1: 
NetR11_2: 
NetR12_2: 
NetR22_2: 
NetR28_2: 
NetR30_2: 
NetR33_1: 
NetR39_1: 
NetR52_1: 
NetR53_3: 
NetR53_4: 
NetR64_1: 
NetR84_1: R84.1 U13.25 | length 72.4
  Component Side w10: U13.25@649.92,275.63 714.37,275.63 v1(720,270)
NetU2_85: 
NetU2_86: 
NetU2_87: 
NetU10_1: 
NetU10_2: 
POWER_BTN: 
PRECHARGE_GATE: 
REF: 
RX: U13.9
SGND: 
SPI1.MISO: 
SPI1.MOSI: 
SPI1.RSTB: 
SPI1.SCK: 
SPI1.SYNC: 
SPI2.CS1: 
SPI2.CS2: 
SPI2.MISO: 
SPI2.MOSI: 
SPI2.SCK: 
SWD.NRST: 
SWD.SWCLK: 
SWD.SWDIO: 
SWD.SWO: 
TX: U13.8
USB.DM: 
USB.DP: 
V-: 
VBB: 
VCC: C32.1 D14.1 L4.2 U6.3 U8.3 U13.15 U13.24
VDD: C61.2
VUSB: D11.2
pads on no net: U6.7_1 U6.7_2 U8.5 U8.8 U13.5 U13.6 U13.7 U13.10 U13.11 U13.12 U13.13 U13.14 U13.16 U13.17 U13.18 U13.19 U13.20 U13.21 U13.22 U13.23 U13.28

## Polygon pours and split planes (outlines as drawn)
SGND on Ground Plane (split plane): 221 vertices, not listed, extent 20,20.03 4555,1979.97
VCC on Power Plane (split plane): 235 vertices, not listed, extent 20,20.03 4555,1979.97

## Keep-outs
Keep-Out Layer:
  lines w10: 100,0 cw(c100,100) 100,200 150,200 ccw(c150,250) 200,250 200,1750 ccw(c150,1750) 150,1800 100,1800 cw(c100,1900) 100,2000 200,2000 4375,2000 4475,2000 cw(c4475,1900) 4475,1800 4425,1800 ccw(c4425,1750) 4375,1750 4375,250 ccw(c4425,250) 4425,200 4475,200 cw(c4475,100) 4475,0 4375,0 200,0 100,0

## Other copper
Component Side:
  pour cut-out: 2275,1460 2275,1675 2265,1665 475,1665 475,1590 570,1590 570,1460
  region net DSG+: 4090,60 4090,240 4335,240 4335,60
  region net B+: 4080,1750 4080,1975 4330,1975 4330,1750
  region net B+: 4075,1365 4075,1985 4335,1985 4335,1365
Solder Side:
  region net DSG+: 3985,380 3985,645 4335,645 4335,25 4025,25 4025,340
  region net DSG-: 3525,25 4010,25 4010,335 3970,375 3970,1175 4110.01,1315 4340,1315 4340,1625 3600,1625 3425,1450 3425,420 3525,320
  region net GND: 3600,1660 4340,1660 4340,1820.36 4204.64,1820.36 4165,1860 4165,1975 3600,1975
Power Plane (plane layer: these items are gaps in the copper):
  lines w10: 300,300 410,190 410,-5 370,-5

## Silkscreen, mask and mechanical layers (free items; w line width, h text height)
Bottom Overlay:
  circle w10: c4475,1900 r196.85
  circle w10: c4475,100 r196.85
  circle w10: c100,1900 r196.85
  lines w10: 191.88,274.09 cw(c100,100) 270.91,2.33
  text "0" at 770,1940 h20
  text "VCC" at 4255,1765 h20
  text "SWDIO" at 4255,1665 h20
  text "5V" at 357.92,175 h20
  text "SIG" at 444.99,175 h20
  text "GND" at 525.4,175 h20

## Text inside footprints (layer, text, board x,y; h text height)
JP14: Top Overlay "1" at 315,2015 h20 r270; Top Overlay "2" at 420,2020 h20 r270; Top Overlay "4" at 420,1785 h20 r270; Top Overlay "3" at 320,1785 h20 r270